# Altium PCB PCB.PcbDoc
Units mm, origin at the board's own origin, x right, y up, seen from the top; angles counter-clockwise.
Board outline 40.8 x 72.4 mm, 2 copper layers (Top Layer, Bottom Layer); 67 components, 54 nets, 238 pads, 98 vias.
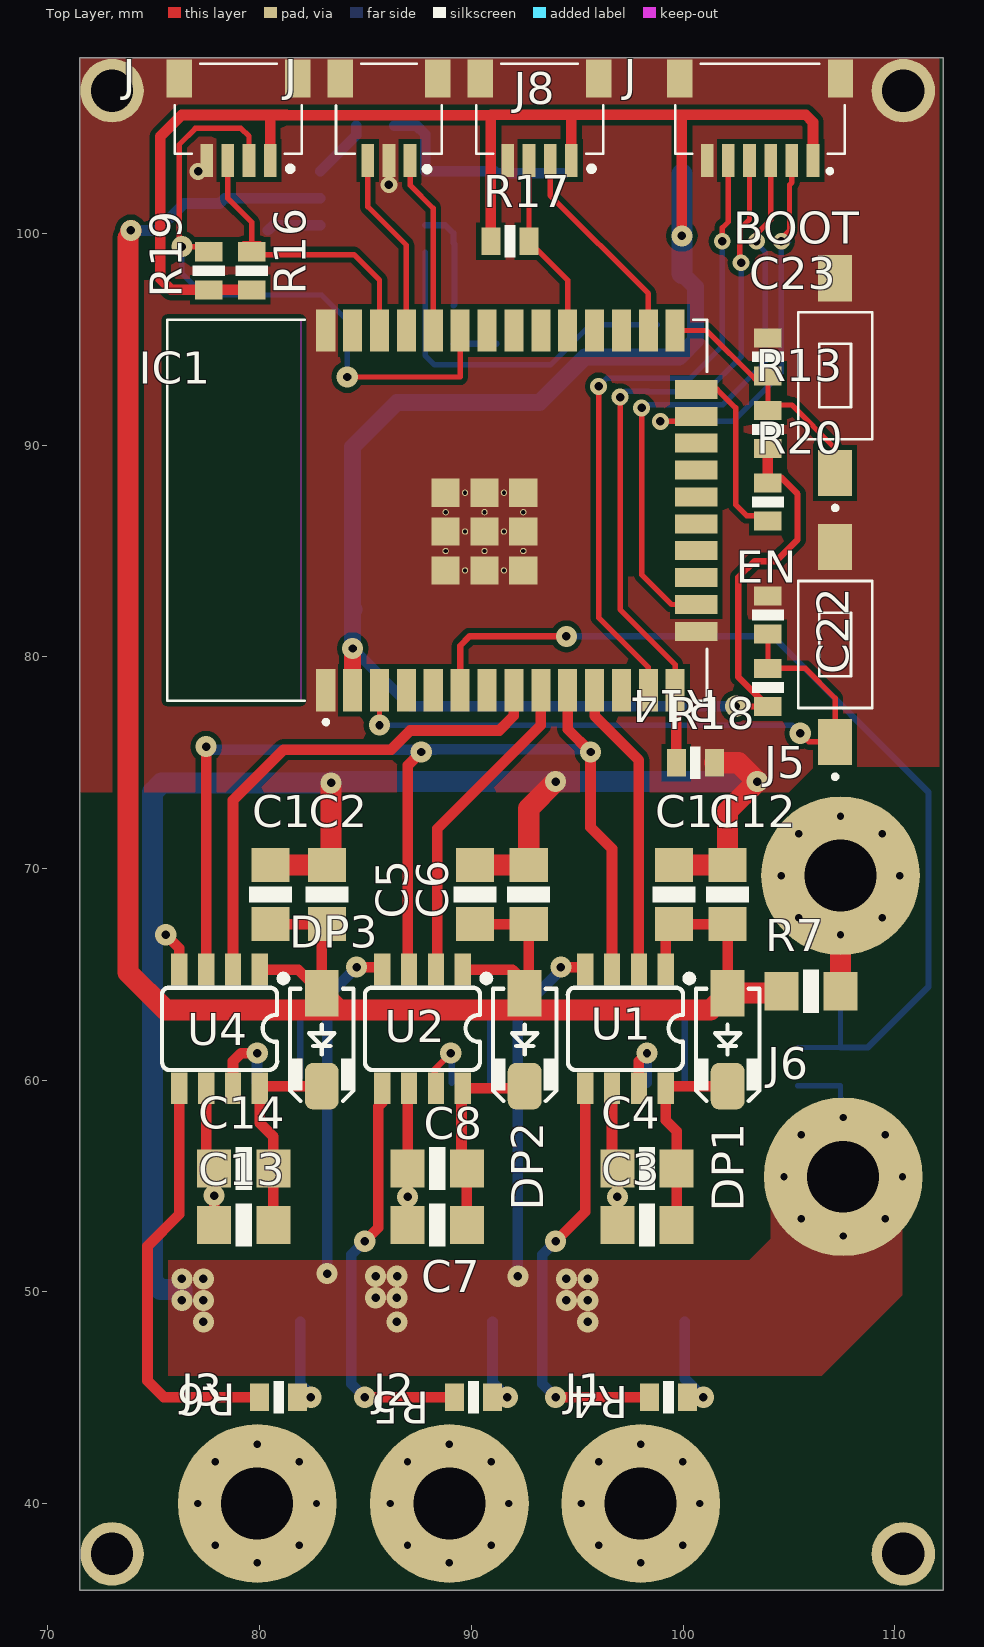
[diagram p0: Top Layer view]
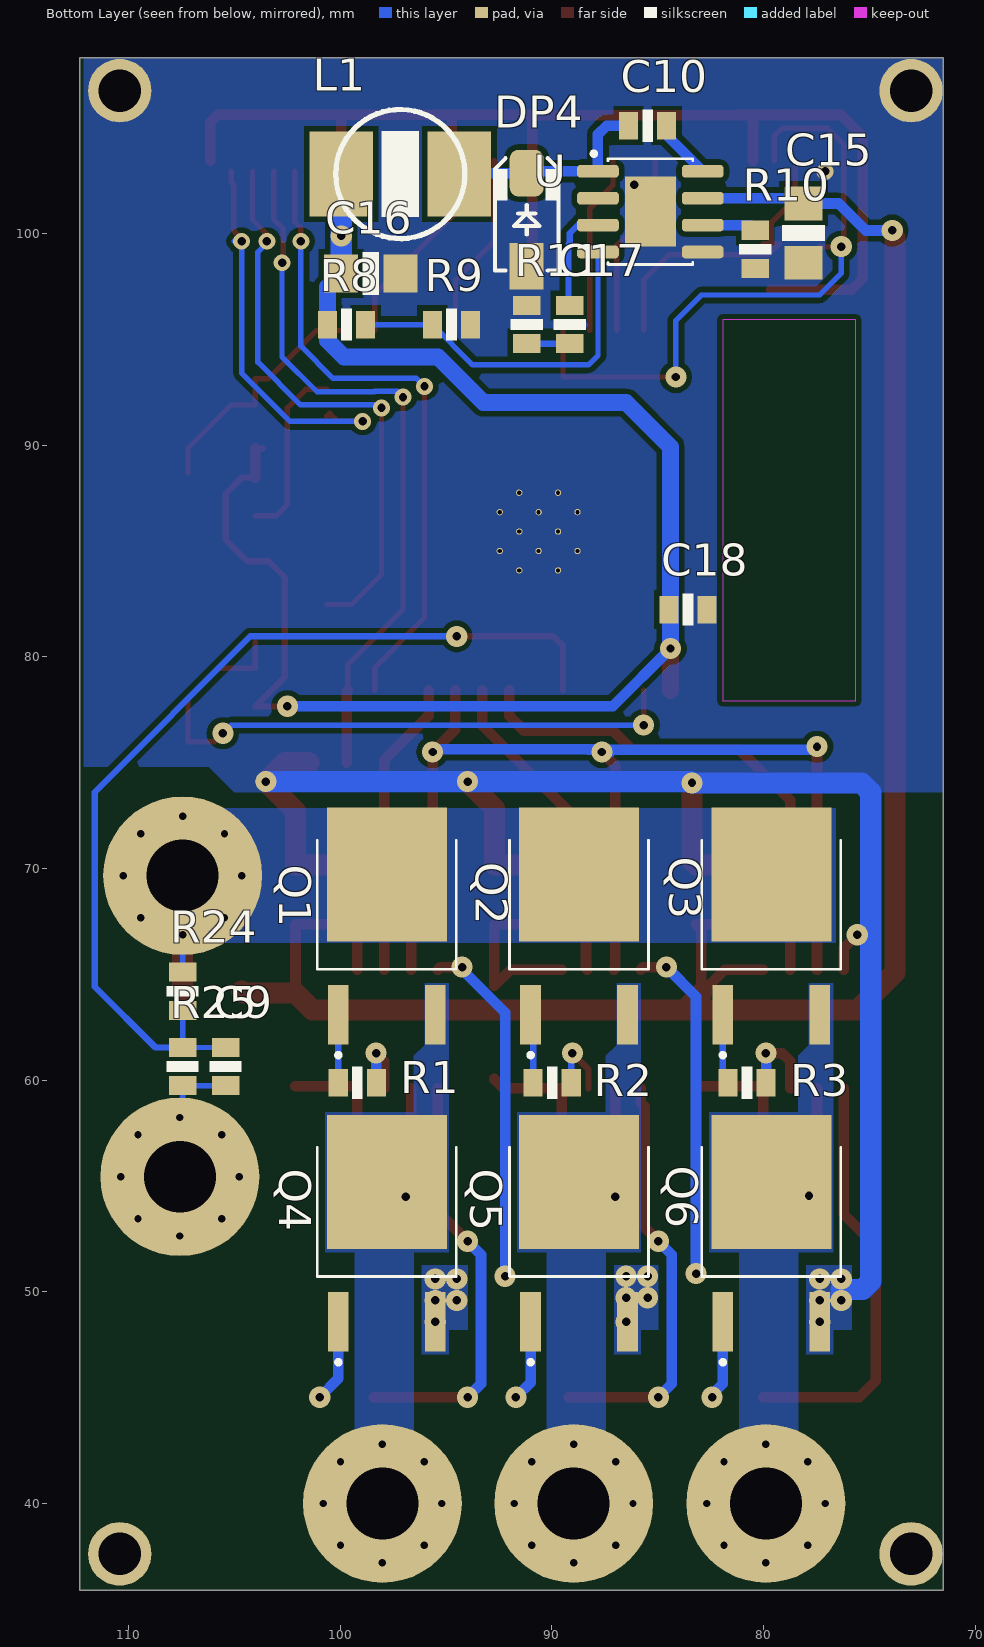
[diagram p1: Bottom Layer view, seen from below]

## Layer stack, top to bottom
Top Solder: solder mask 0.0102, Solder Resist, Dk 3.5
Top Layer: signal copper 0.0356
Dielectric 1: dielectric 0.32, FR-4, Dk 4.8
Bottom Layer: signal copper 0.0356
Bottom Solder: solder mask 0.0102, Solder Resist, Dk 3.5

## Board outline
71.5,35.9 71.5,108.3 112.3,108.3 112.3,35.9

## Design rules (kind name [scope] priority, off if disabled: settings)
Clearance [All] p1: gap=0.254 ignorepadtopadclearanceinfootprint=FALSE except(0: Arc-Hole Track-Hole SMDPad-Hole THPad-Hole Via-Hole Fill-Hole Poly-Hole Region-Hole Text-Hole)
PolygonConnect [All] p1: connectstyle=Direct reliefconductorwidth=0.254 reliefentries=4 polygonreliefangle="90 Angle" airgapwidth=0.254
RoutingVias [All] p1: holewidth=0.711 width=1.27 viastyle="Through Hole" minholewidth=0.711 minwidth=1.27 maxholewidth=0.711 maxwidth=1.27
SolderMaskExpansion [All] p1: expansion=0.102
Width [All] p1: maxlimit=4 minlimit=0.254 preferedwidth=0.3
30 further rules are at their usual default settings.

## Classes and differential pairs
component class mcu: BOOT BOOT? C9 C18 C22 C23 EN EN? IC1 IC? J J8 R13 R14 R16 R17 R18 R19 R20 R24 R25 R?
component class power: C1 C2 C3 C4 C5 C6 C7 C8 C10 C11 C12 C13 C14 C15 C16 C17 C? DP1 DP2 DP3 DP4 J1 J2 J3 J5 J6 L1 Q1 Q2 Q3 Q4 Q5 Q6 Q? R1 R2 R3 R4 R5 R6 R7 R8 R9 R10 R11 R? U U1 U2 U4 UP?

## Components (designator, comment, footprint, x,y, rotation, side; value= is the part's Value field where it differs from the comment)
BOOT "1437566-4" SW_1437566-4 107.188,93.281 r90 top
C1 "Cap" _1206 80.518,68.77 r90 top value=100nF
C2 "Cap" _1206 83.185,68.77 r90 top value=10uF
C3 "Cap" _1206 98.298,53.149 r180 top value=100nF
C4 "Cap" _1206 98.298,55.816 r180 top value=10uF
C5 "Cap" _1206 90.17,68.77 r90 top value=100nF
C6 "Cap" _1206 92.71,68.77 r90 top value=10uF
C7 "Cap" _1206 88.392,53.149 r180 top value=100nF
C8 "Cap" _1206 88.392,55.816 r180 top value=10uF
C9 "Cap" _0805 105.41,60.642 r270 bottom value=100nF
C10 "Cap" _0805 85.471,105.093 r0 bottom value=100nF
C11 "Cap" _1206 99.568,68.77 r90 top value=100nF
C12 "Cap" _1206 102.108,68.77 r90 top value=10uF
C13 "Cap" _1206 79.248,53.149 r180 top value=100nF
C14 "Cap" _1206 79.248,55.816 r180 top value=10uF
C15 "Cap" _1206 78.105,100.013 r270 bottom value=10uF
C16 "Cap" _1206 98.552,98.108 r180 bottom value=10uF
C17 "Cap" _0805 89.154,95.694 r270 bottom value=150pF
C18 "Cap" _0805 83.566,82.233 r180 bottom value=100nF
C22 "Cap" _0805 104.013,81.978 r90 top value=100nF
C23 "Cap" _0805 104.013,94.17 r90 top value=100nF
DP1 "1N5819" 430X270D 102.108,61.912 r270 top
DP2 "1N5819" 430X270D 92.519,61.912 r270 top
DP3 "1N5819" 430X270D 82.931,61.912 r270 top
DP4 "1N5819" 430X270D 91.186,100.647 r90 bottom
EN "1437566-4" SW_1437566-4 107.188,80.581 r90 top
IC1 "ESP32-WROOM-32" MODULE_ESP32-WROOM-32 88.381,86.916 r90 top
J "SPI" JST_SM06B-SRSS-TB(LF)(SN) 103.64,103.441 r180 top
J "ENC/I2C" JST_SM04B-SRSS-TB(LF)(SN) 78.994,103.441 r180 top
J "UART" JST_SM03B-SRSS-TB(LF)(SN) 86.106,103.441 r180 top
J1 "" "M3 Spade Hole" 98,40 r0 top
J2 "" "M3 Spade Hole" 88.963,40 r0 top
J3 "" "M3 Spade Hole" 79.883,40 r0 top
J5 "" "M3 Spade Hole" 107.442,69.659 r0 top
J6 "" "M3 Spade Hole" 107.569,55.435 r0 top
J8 "CAN/ANG" JST_SM04B-SRSS-TB(LF)(SN) 93.226,103.441 r180 top
L1 "Inductor" _INDUCTOR-SMD-6.0mm 97.155,102.806 r0 bottom value=10uH
Q1 "FILL_FOOTPRINT" TO229P994X240-3N 97.791,67.276 r90 bottom
Q2 "FILL_FOOTPRINT" TO229P994X240-3N 88.711,67.276 r90 bottom
Q3 "FILL_FOOTPRINT" TO229P994X240-3N 79.63,67.276 r90 bottom
Q4 "FILL_FOOTPRINT" TO229P994X240-3N 97.791,52.768 r90 bottom
Q5 "FILL_FOOTPRINT" TO229P994X240-3N 88.711,52.768 r90 bottom
Q6 "FILL_FOOTPRINT" TO229P994X240-3N 79.63,52.768 r90 bottom
R1 "Resistor" _0805 99.187,59.88 r180 bottom value=10R
R2 "Resistor" _0805 89.98,59.88 r180 bottom value=10R
R3 "Resistor" _0805 80.773,59.88 r180 bottom value=10R
R4 "Resistor" _0805 99.312,45.021 r180 top value=10R
R5 "Resistor" _0805 90.105,45.021 r180 top value=10R
R6 "Resistor" _0805 80.898,45.021 r180 top value=10R
R7 "Resistor" _1206 106.045,64.198 r180 top value=0
R8 "Resistor" _0805 99.695,95.694 r0 bottom value=100K
R9 "Resistor" _0805 94.742,95.694 r0 bottom value=100K
R10 "Resistor" _0805 80.391,99.251 r90 bottom value=100K
R11 "Resistor" _0805 91.186,95.694 r270 bottom value=100K
R13 "Resistor" _0805 104.013,90.742 r270 top value=4.7K
R14 "Resistor" _0805 104.013,78.549 r270 top value=4.7K
R16 "Resistor" _0805 79.629,98.234 r270 top value=4.7K
R17 "Resistor" _0805 91.821,99.632 r180 top value=4.7K
R18 "Resistor" _0805 100.584,74.993 r180 top value=4.7K
R19 "Resistor" _0805 77.597,98.234 r270 top value=4.7K
R20 "Resistor" _0805 104.013,87.312 r90 top value=4.7K
R24 "Resistor" _0805 107.442,64.198 r90 bottom value=4.7K
R25 "Resistor" _0805 107.442,60.642 r90 bottom value=4.7K
U "MP1584EN" SOIC127P600X170-9N 85.344,101.028 r180 bottom
U1 "IR2104" _SO08 97.282,62.42 r180 top
U2 "IR2104" _SO08 87.694,62.42 r180 top
U4 "IR2104" _SO08 78.105,62.42 r180 top

## Footprints (in the part's own frame and the unit in brackets; to place one, negate y for a bottom-side part, rotate by r counter-clockwise, add the part's x,y. Pads: shape width x height; smd on the part's side, far side on the other; paste and mask are expansions set on the pad)
430X270D [mm] "SMA Molded Diode, 2-Leads, Body 4.3x2.7mm"
  rect 2.2x1.6 smd: 1(-2.2,0)
  rrect50% 2.2x1.6 smd: 2(2.2,0)
  silkscreen extent -2.4,-1.5 2.9,1.5, body extent -2.75,-1.4 2.75,1.4, height 2.6
_0805 [mm]
  rect 0.9x1.3 smd: 1(-0.9,0) 2(0.9,0)
  silkscreen extent -0.25,-0.76 0.25,0.76
_1206 [mm]
  rect 1.6x1.8 smd: 1(-1.4,0) 2(1.4,0)
  silkscreen extent -0.38,-1.02 0.38,1.02
_INDUCTOR-SMD-6.0mm [mm]
  rect 3x4 smd: 1(-2.794,0) 2(2.794,0)
  silkscreen extent -3.05,-3.05 3.05,3.05
_SO08 [mm]
  rect 0.77x1.5 smd: 1(-1.905,-2.8) 2(-0.635,-2.8) 3(0.635,-2.8) 4(1.905,-2.8) 5(1.905,2.8) 6(0.635,2.8) 7(-0.635,2.8) 8(-1.905,2.8)
  silkscreen extent -3.33,-2.7 2.72,1.95
JST_SM03B-SRSS-TB(LF)(SN) [mm]
  rect 0.6x1.55 smd: 1(-1,0) 2(0,0) 3(1,0)
  rect 1.2x1.8 smd: S1(-2.3,-3.875) S2(2.3,-3.875)
  silkscreen extent -2.5,-4.57 2.5,0.5
JST_SM04B-SRSS-TB(LF)(SN) [mm]
  rect 0.6x1.55 smd: 1(-1.5,0) 2(-0.5,0) 3(0.5,0) 4(1.5,0)
  rect 1.2x1.8 smd: S1(-2.8,-3.875) S2(2.8,-3.875)
  silkscreen extent -3,-4.57 3,0.48
JST_SM06B-SRSS-TB(LF)(SN) [mm]
  rect 0.6x1.55 smd: 1(-2.5,0) 2(-1.5,0) 3(-0.5,0) 4(0.5,0) 5(1.5,0) 6(2.5,0)
  rect 1.2x1.8 smd: S1(-3.8,-3.875) S2(3.8,-3.875)
  silkscreen extent -4,-4.57 4,0.6
"M3 Spade Hole" [mm]
  round 7.5 hole 3.4: 1(0,0)
MODULE_ESP32-WROOM-32 [mm]
  rect 2x0.9 smd: 1(-8.5,5.26) 2(-8.5,3.99) 3(-8.5,2.72) 4(-8.5,1.45) 5(-8.5,0.18) 6(-8.5,-1.09) 7(-8.5,-2.36) 8(-8.5,-3.63) 9(-8.5,-4.9) 10(-8.5,-6.17) 11(-8.5,-7.44) 12(-8.5,-8.71) 13(-8.5,-9.98) 14(-8.5,-11.25) 25(8.5,-11.25) 26(8.5,-9.98) 27(8.5,-8.71) 28(8.5,-7.44) 29(8.5,-6.17) 30(8.5,-4.9) 31(8.5,-3.63) 32(8.5,-2.36) 33(8.5,-1.09) 34(8.5,0.18) 35(8.5,1.45) 36(8.5,2.72) 37(8.5,3.99) 38(8.5,5.26)
  rect 0.9x2 smd: 15(-5.715,-12.25) 16(-4.445,-12.25) 17(-3.175,-12.25) 18(-1.905,-12.25) 19(-0.635,-12.25) 20(0.635,-12.25) 21(1.905,-12.25) 22(3.175,-12.25) 23(4.445,-12.25) 24(5.715,-12.25)
  rect 1.33x1.33 smd: 39_1(-2.835,-0.405) 39_2(-1,-0.405) 39_3(0.835,-0.405) 39_4(-2.835,-2.24) 39_5(-1,-2.24) 39_6(0.835,-2.24) 39_7(-2.835,-4.075) 39_8(-1,-4.075) 39_9(0.835,-4.075)
  round 0.3 hole 0.2: 39_10(-1.917,-0.405) 39_11(-0.082,-0.405) 39_12(-2.835,-1.322) 39_13(-1,-1.322) 39_14(0.835,-1.322) 39_15(-1.917,-2.24) 39_16(-0.082,-2.24) 39_17(-2.835,-3.157) 39_18(-1,-3.157) 39_19(0.835,-3.157) 39_20(-1.917,-4.075) 39_21(-0.082,-4.075)
  Keep-Out Layer region: 9,6.45 -9,6.45 -9,12.75 9,12.75
  Keep-Out Layer region: 9,6.45 -9,6.45 -9,12.75 9,12.75
  silkscreen extent -10.1,-12.75 9,12.75, body extent -9,-12.75 9,12.75, height 3.2
SOIC127P600X170-9N [mm]
  rrect54% 1.97x0.6 smd: 1(-2.475,1.905) 2(-2.475,0.635) 3(-2.475,-0.635) 4(-2.475,-1.905) 5(2.475,-1.905) 6(2.475,-0.635) 7(2.475,0.635) 8(2.475,1.905)
  rect 2.41x3.3 smd paste-3: 9(0,0)
  silkscreen extent -2.77,-2.5 2,2.84
SW_1437566-4 [mm]
  rect 2.18x1.6 smd: 1(-4.6,0) 2(4.6,0)
  silkscreen extent -6.35,-1.75 3,1.75
TO229P994X240-3N [mm]
  rect 6.33x5.67 smd paste-4: D(2.43,0)
  rect 2.81x0.98 smd: G(-4.19,2.29) S(-4.19,-2.29)
  silkscreen extent -6.19,-3.28 4.06,3.28

## Part data
BOOT EN: "Switch Tactile OFF _ON_ SPST Rectangular Button Gull Wing 0.05A 12VDC 1.77N SMD T/R", Contact_Current_Rating="50 mA", Package=None, Configuration_Pole-Throw="Single Pole - Single Throw", Digi-Key_Part_Number=450-1758-1-ND, Digi-Key_Purchase_URL=https://www.digikey.com/product-detail/en/te-connectivity-alcoswitch-switches/FSMSMTR/450-1758-1-ND/2271637?utm_source=snapeda&utm_medium=aggregator&utm_campaign=symbol, MF="TE Connectivity", MP=FSMSMTR, SnapEDA_Link=https://www.snapeda.com/parts/FSMSMTR/TE%20Connectivity%20ALCOSWITCH%20Switches/view-part/2118497/?ref=snap, TE_purchase_URL=https://www.te.com/usa-en/product-1437566-4.html?te_bu=Cor&te_type=disp&te_campaign=seda_glo_cor-seda-global-disp-prtnr-fy19-seda-model-bom-cta_sma-317_1&elqCampaignId=32493
C1 C2 C3 C4 C5 C6 C7 C8 C9 C10 C11 C12 C13 C14 C15 C16 C17 C18 C22 C23: library part Cap_1
DP1 DP2 DP3 DP4: "Schottkey Rectifiers", Data=16-12-2016, Designer="Abbas Basereh"
IC1: "Bluetooth, WiFi 802.11b/g/n, Bluetooth v4.2 +EDR, Class 1, 2 and 3 Transceiver Module 2.4GHz ~ 2.5GHz Antenna Not Included, U.FL Surface Mount", Package="Module Espressif Systems", Check_prices=https://www.snapeda.com/parts/ESP32-WROOM-32/Espressif+Systems/view-part/?ref=eda, Digi-Key_Part_Number=1965-ESP32-WROOM-32U-N4CT-ND, MF="Espressif Systems", MP=ESP32-WROOM-32, Purchase-URL=https://pricing.snapeda.com/search/part/ESP32-WROOM-32/?ref=eda, SnapEDA_Link=https://www.snapeda.com/parts/ESP32-WROOM-32/Espressif+Systems/view-part/?ref=snap
J: library part SM06B-SRSS-TB(LF)(SN), "Connector Header Surface Mount, Right Angle 6 position 0.039 _1.00mm_", Package=None, Digi-Key_Part_Number=455-1806-1-ND, Digi-Key_Purchase_URL=https://www.digikey.com/product-detail/en/jst-sales-america-inc/SM06B-SRSS-TB_LF__SN_/455-1806-1-ND/926877?utm_source=snapeda&utm_medium=aggregator&utm_campaign=symbol, MF="JST Sales", MP=SM06B-SRSS-TB_LF__SN_, SnapEDA_Link=https://www.snapeda.com/parts/SM06B-SRSS-TB%28LF%29%28SN%29/JST%20Sales%20America%20Inc./view-part/554386/?ref=snap
J J8: library part SM04B-SRSS-TB(LF)(SN), "Connector Header Surface Mount, Right Angle 4 position 0.039 _1.00mm_", Package=None, Availability=Unavailable, MF="JST Sales", MP=SM04B-SRSS-TB_LF__SN_, Price=None, SnapEDA_Link=https://www.snapeda.com/parts/SM04B-SRSS-TB%28LF%29%28SN%29/JST%20Sales%20America%20Inc./view-part/557466/?ref=snap
J: library part SM03B-SRSS-TB(LF)(SN), "Connector Header Surface Mount, Right Angle 3 position 0.039 _1.00mm_", Package=None, Availability=Unavailable, MF="JST Sales", MP=SM03B-SRSS-TB_LF__SN_, Price=None, SnapEDA_Link=https://www.snapeda.com/parts/SM03B-SRSS-TB%28LF%29%28SN%29/JST%20Sales%20America%20Inc./view-part/3227115/?ref=snap
J1 J2 J3 J5 J6: library part "M3 Spade Terminal", "M3 Spade Terminal"
Q1 Q2 Q3 Q4 Q5 Q6: library part NTMFS4935NT1G, "MOSFET N-CH 30V 13A SO8FL", Current - Continuous Drain (Id) @ 25°C="13A (Ta), 93A (Tc)", Drain to Source Voltage (Vdss)=30V, Drive Voltage (Max Rds On,  Min Rds On)="4.5V, 10V", Input Capacitance (Ciss) (Max) @ Vds="4850pF @ 15V", Manufacturer="ON Semiconductor", Operating Temperature="-55°C ~ 150°C (TJ)", Package / Case="8-PowerTDFN, 5 Leads", Power Dissipation (Max)="930mW (Ta), 48W (Tc)", Supplier Device Package="5-DFN (5x6) (8-SOFL)", Supplier Part Number 1=NTMFS4935NT1GOSCT-ND, Category="Discrete Semiconductor Products", ComponentLink1Description=http://www.onsemi.com/pub_link/Collateral/NTMFS4935N-D.PDF, ComponentLink1URL=http://www.onsemi.com/pub_link/Collateral/NTMFS4935N-D.PDF, FET Feature=-, FET Type=N-Channel, Gate Charge (Qg) (Max) @ Vgs="49.4nC @ 10V", Manufacturer Part Number=NTMFS4935NT1G, Mounting Type="Surface Mount", Packaging="Cut Tape (CT)", Part Status=Active, Pricing 1="1=0.61, 10=0.541, 100=0.4145, 500=0.3277 (USD)", Rds On (Max) @ Id, Vgs="3.2 mOhm @ 30A, 10V", RoHS="RoHS Compliant", Stock 1=932, Supplier 1=Digi-Key, Technology="MOSFET (Metal Oxide)", Vgs (Max)=±20V, Vgs(th) (Max) @ Id="2.2V @ 250µA"
U: "Buck Switching Regulator IC Positive Adjustable 0.8V 1 Output 3A 8-SOIC _0.154, 3.90mm Width_ Exposed Pad", Package="SOIC-8 Monolithic Power", Availability=Unavailable, MF="Monolithic Power", MP=MP1584EN, Price=None, SnapEDA_Link=https://www.snapeda.com/parts/MP1584EN/Monolithic%20Power%20Systems%20Inc./view-part/891721/?ref=snap

## Free pads (board coordinates)
  round 3 hole 2: ""(73.025,37.618) ""(73.025,106.743) ""(110.409,37.618) ""(110.409,106.743)

## Via types
v1: diameter 1, hole 0.4, Top Layer to Bottom Layer, 48 vias
v2: diameter 0.7, hole 0.35, Top Layer to Bottom Layer, 40 vias
v3: diameter 0.8, hole 0.4, Top Layer to Bottom Layer, 10 vias

## Nets (pads, with @x,y where several pads share a name; then routed paths per layer and width w, separated by ;. In a path a pad name is that pad's centre, name@x,y a point inside that pad or via, vN(x,y) a via of type N, cw(c..) or ccw(c..) an arc to the next point about the centre after c; other vN are vias at no path point)
3V3: C16.1 C18.1 IC1.2 J8.1 J.1@80.494,103.441 J.1@106.14,103.441 L1.2 R8.2 R13.2 R14.2 R16.2 R17.2 R19.2 R20.2 | length 134.9
  Top Layer w0.3: v1(102.489,77.66) 102.5,77.65 R14.2 102.616,79.047 102.616,83.757 103.378,84.519 104.394,84.519 105.41,85.534 105.41,87.694 104.637,88.466 R20.2@104.013,88.466 ; R13.2@103.643,89.842 R13.2
  Top Layer w0.5: R16.2 R19.2 75.83,97.335 75.307,97.858 75.307,104.58 76.323,105.596 81.252,105.596 81.259,105.59 90.921,105.59 ; J.1@80.494,103.441 80.494,105.474 ; R17.2 90.921,105.59 ; J8.1 94.726,105.585 ; v1(99.949,99.885) 99.949,105.6 ; R20.2@104.013,88.466 R13.2 ; J.1@106.14,103.441 106.14,105.251 105.791,105.6 99.949,105.6 ; 90.921,105.59 90.932,105.6 99.949,105.6
  Top Layer w0.8: IC1.2 v1(84.391,80.392)
  Bottom Layer w0.5: v1(84.391,80.392) 87.122,77.66 v1(102.489,77.66)
  Bottom Layer w0.8: v1(84.391,80.392) C18.1@84.391,82.158 ; C18.1 C18.1@84.391,82.158 ; C16.1 100.595,97.465 R8.2 100.595,94.943 99.822,94.17 95.377,94.17 93.218,92.011 86.487,92.011 84.391,89.915 C18.1@84.391,82.158
  Bottom Layer w1: L1.2 v1(99.949,99.885) 99.949,98.111 C16.1
+12V: C1.1 C2.1 C5.1 C6.1 C11.1 C12.1 C15.1 DP1.1 DP2.1 DP3.1 R7.2 U1.1 U2.1 U4.1 U.7 | length 103.9
  Top Layer w0.5: U4.1 81.823,65.221 DP3.1 82.931,67.116 C2.1 C1.1 ; U2.1@89.535,65.221 U2.1 91.942,65.221 92.71,64.453 C6.1 C5.1 ; U1.1 99.187,66.989 C11.1 C12.1 DP1.1
  Top Layer w1: v1@73.787,99.787 73.787,65.087 75.565,63.309 83.734,63.309 ; v1@73.9,100.1 73.914,100.114 v1(73.914,100.139) ; DP3.1 83.734,63.309 ; R7.2 104.559,64.113 DP1.1 101.305,63.309 83.734,63.309
  Bottom Layer w0.5: v1(73.914,100.139) 75.161,100.139 76.434,101.413 C15.1 78.356,101.663 U.7
A_N: IC1.5
A_P: IC1.4
"CAN RX": IC1.26 J8.2 | length 9.9
  Top Layer w0.254: J8.2 93.726,101.79 98.361,97.156 IC1.26
"CAN TX": IC1.29 J8.3 R17.1 | length 8.8
  Top Layer w0.254: J8.3 92.726,99.615 94.551,97.791 IC1.29
CS: IC1.23 J.2@105.14,103.441 | length 19.2
  Top Layer w0.254: v3(98.933,91.123) 100.107,91.123 100.488,91.504 IC1.23 ; J.2@105.14,102.933 105.14,102.41 105.029,102.298 105.029,100.139 v3@104.821,99.931 ; v3@104.821,99.931 104.821,99.804 v3(104.648,99.632) 104.648,99.758 v3@104.821,99.931
  Bottom Layer w0.254: v3(98.933,91.123) 102.362,91.123 104.648,93.408 104.648,99.282 104.997,99.632 v3(104.648,99.632)
DCBUS: J5.1 Q1.D Q2.D Q3.D R7.1 R24.2 | length 4.4
  Top Layer w1: v2(107.442,66.859) 107.445,66.856 R7.1
  Bottom Layer w0.254: R24.2 v2(107.442,66.859)
  other v2: 105.462,67.68 109.422,67.68 104.642,69.659 110.242,69.659 105.462,71.639 109.422,71.639 107.442,72.46
DIR: IC1.31
EN: C22.1 EN.1 IC1.3 R14.1 | length 30.6
  Top Layer w0.254: v1(85.661,76.772) IC1.3 ; C22.1@104.013,80.698 R14.1 105.78,79.449 107.188,78.041 EN.1 105.946,75.982 v1(105.537,76.391)
  Bottom Layer w0.254: v1(85.661,76.772) 105.156,76.772 v1(105.537,76.391)
ENABLE: IC1.27
ESTOP: IC1.28
G_EN: IC1.10 U1.3 U2.3 U4.3 | length 54.9
  Top Layer w0.5: U4.3 v1(77.47,75.755) ; U2.3 86.995,65.284 86.995,74.867 v1(87.63,75.501) ; IC1.10 94.551,76.582 v1(95.631,75.501) 95.631,71.945 96.647,70.929 U1.3
  Bottom Layer w0.5: v1(77.47,75.755) 77.609,75.617 v1@87.364,75.617 ; v1(87.63,75.501) 87.249,75.501 v1@87.364,75.617 ; 88.265,75.617 v1@87.364,75.617 ; v1(95.631,75.501) 95.504,75.629 87.376,75.629 v1@87.364,75.617
GH_A: R1.2 U1.7 | length 3.2
  Top Layer w0.5: U1.7 97.917,60.896 v1(98.298,61.277)
  Bottom Layer w0.5: R1.2 98.287,61.267 v1(98.298,61.277)
GH_B: R2.2 U2.7 | length 3.4
  Top Layer w0.3: U2.7@88.265,59.62 88.265,60.515 v1(89.027,61.277)
  Bottom Layer w0.3: v1(89.027,61.277) 89.08,61.224 R2.2
GH_C: R3.2 U4.7 | length 4
  Top Layer w0.5: U4.7 78.74,60.896 79.121,61.277 v1(79.883,61.277)
  Bottom Layer w0.5: R3.2 79.874,61.268 v1(79.883,61.277)
GL_A: R4.2 U1.5 | length 20.1
  Top Layer w0.5: v1(93.98,45.021) R4.2 ; v1(93.98,52.387) 95.377,53.785 U1.5
  Bottom Layer w0.5: v1(93.98,45.021) 93.345,45.657 93.345,51.752 v1(93.98,52.387)
GL_B: R5.2 U2.5 | length 19.7
  Top Layer w0.5: v1(84.963,45.021) R5.2 ; v1(84.963,52.387) 85.598,53.023 85.598,58.737 85.788,58.928 U2.5
  Bottom Layer w0.5: v1(84.963,45.021) 84.328,45.657 84.328,51.752 v1(84.963,52.387)
GL_C: R6.2 U4.5 | length 20.1
  Top Layer w0.5: U4.5 76.2,53.657 74.7,52.158 74.7,45.8 75.479,45.021 R6.2
GND: BOOT.2 C1.2 C2.2 C5.2 C6.2 C9.2 C11.2 C12.2 C15.2 C16.2 C18.2 C22.2 C23.2 DP4.1 EN.2 IC1.1 IC1.15 IC1.38 IC1.39_1 IC1.39_2 IC1.39_3 IC1.39_4 IC1.39_5 IC1.39_6 IC1.39_7 IC1.39_8 IC1.39_9 IC1.39_10 IC1.39_11 IC1.39_12 IC1.39_13 IC1.39_14 IC1.39_15 IC1.39_16 IC1.39_17 IC1.39_18 IC1.39_19 IC1.39_20 IC1.39_21 J6.1 J8.4 J8.S1 J8.S2 J.2@86.106,103.441 J.4@77.494,103.441 J.6 J.S1 J.S2 pad.@73.025,106.743 pad.@110.409,106.743 Q4.S Q5.S Q6.S R9.1 R10.1 R11.1 R18.1 R25.1 U1.4 U2.4 U4.4 U.5 U.9 | length 115.5
  Top Layer w0.5: v1(75.565,66.865) 76.2,66.23 U4.4 ; v1(84.582,65.341) 85.668,65.341 U2.4 ; v1(94.234,65.341) 95.256,65.341 U1.4
  Top Layer w1: C1.2 C2.2 83.376,70.361 v1(83.376,74.041) ; C5.2 C6.2 92.71,72.834 v1(93.98,74.105) ; C11.2 C12.2 102.108,72.707 v1(103.505,74.105) 102.616,74.993 R18.1
  Bottom Layer w0.254: C9.2 R25.1 107.442,58.363 v2(107.569,58.236)
  Bottom Layer w0.5: v1(83.185,50.863) 83.185,63.944 v1(84.582,65.341) ; v1(92.202,50.736) 92.202,63.182 94.234,65.215 v1(94.234,65.341)
  Bottom Layer w1: v1(76.327,49.593) 76.327,50.102 75.311,50.102 74.93,50.482 74.93,73.596 75.374,74.041 v1(83.376,74.041) 83.439,74.105 v1(93.98,74.105) v1(103.505,74.105)
  other v1: 77.34,48.579 86.484,48.579 95.501,48.579 94.488,49.593 77.34,49.595 95.501,49.595 85.474,49.719 86.487,49.721 76.327,50.609 77.343,50.609 94.488,50.609 95.504,50.609 85.474,50.735 86.49,50.735
  other v2: 107.569,52.635 105.589,53.456 109.549,53.456 104.769,55.435 110.369,55.435 105.589,57.415 109.549,57.415
  other v3: 86.106,102.298 77.089,102.933
HA: IC1.11 U1.2 | length 14.1
  Top Layer w0.5: IC1.11 95.821,77.217 97.917,75.12 U1.2
HB: IC1.9 U2.2 | length 15.2
  Top Layer w0.5: U2.2 88.384,65.276 88.384,71.874 93.281,76.771 IC1.9
HC: IC1.8 U4.2 | length 24.1
  Top Layer w0.5: U4.2 78.74,73.215 81.141,75.617 86.221,75.617 87.122,76.517 91.313,76.517 92.011,77.215 IC1.8
IO0: BOOT.1 C23.1 IC1.25 R13.1 | length 11.8
  Top Layer w0.254: IC1.25 101.117,95.416 103.389,93.144 104.013,93.144 104.013,91.895 105.145,91.895 107.188,89.852 BOOT.1
IO2: IC1.24 R20.1 | length 8.5
  Top Layer w0.254: IC1.24 101.616,92.631 102.489,91.757 102.489,87.185 103.008,86.667 R20.1@104.013,86.667
MISO: IC1.14 J.4@103.14,103.441 R18.2 | length 33.9
  Top Layer w0.254: v3(97.028,92.266) 97.028,82.233 99.631,79.63 IC1.14 ; v3(102.743,98.615) 102.682,98.677 102.682,100.201 103.14,100.659 J.4@103.14,102.933
  Top Layer w0.5: IC1.14 99.684,78.362 R18.2
  Bottom Layer w0.254: v3(97.028,92.266) 97.301,92.539 98.367,92.539 98.387,92.519 101.092,92.519 102.743,94.17 v3(102.743,98.615)
MOSI: IC1.16 J.3@104.14,103.441 | length 27.6
  Top Layer w0.254: v3@98.044,92.011 v3(98.044,91.757) 98.044,83.883 99.457,82.471 IC1.16 ; v3@103.378,99.632 103.378,99.885 104.14,100.647 J.3@104.14,102.933
  Bottom Layer w0.254: v3(98.044,91.757) 98.19,91.904 101.873,91.904 103.886,93.916 103.886,99.123 v3@103.378,99.632
  other v3: 103.463,99.632
NetC3_1: C3.1 C4.1 DP1.2 U1.8 | length 9.6
  Top Layer w0.5: C3.1 C4.1 99.698,57.591 99.187,58.102 U1.8 99.279,59.712 DP1.2
NetC7_1: C7.1 C8.1 DP2.2 U2.8 | length 9.9
  Top Layer w0.5: C7.1 89.792,55.689 89.535,55.947 89.535,59.62 U2.8 92.278,59.62 DP2.2@92.71,60.052
NetC10_1: C10.1 U.8 | length 2.9
  Bottom Layer w0.5: U.8 84.571,104.636 C10.1
NetC10_2: C10.2 DP4.2 L1.1 U.1 | length 10
  Bottom Layer w0.5: C10.2 87.407,105.093 87.819,104.681 U.1 91.1,102.933 DP4.2 94.32,102.848 L1.1
NetC13_1: C13.1 C14.1 DP3.2 U4.8 | length 9.7
  Top Layer w0.5: C13.1 C14.1 80.648,57.337 80.01,57.975 U4.8 80.102,59.712 DP3.2
NetC17_1: C17.1 U.3 | length 5
  Bottom Layer w0.3: U.3 88.773,100.393 89.154,100.013 89.154,99.55 89.208,99.496 89.208,96.648 C17.1
NetC17_2: C17.2 R11.2 | length 2
  Bottom Layer w0.3: C17.2 R11.2
NetQ1_G: Q1.G R1.1 | length 3.2
  Bottom Layer w0.3: Q1.G 100.087,63.08 R1.1
NetQ2_G: Q2.G R2.1 | length 3.3
  Bottom Layer w0.3: R2.1 90.88,62.965 Q2.G
NetQ3_G: Q3.G R3.1 | length 3.3
  Bottom Layer w0.3: R3.1 81.92,60.128 Q3.G
NetQ4_G: Q4.G R4.1 | length 3.9
  Bottom Layer w0.5: Q4.G 100.081,45.905 v1(100.965,45.021)
NetQ5_G: Q5.G R5.1 | length 3.8
  Bottom Layer w0.5: Q5.G 91.001,45.715 v1(91.694,45.021)
NetQ6_G: Q6.G R6.1 | length 3.8
  Bottom Layer w0.5: Q6.G 81.92,45.651 82.423,45.148 v1(82.423,45.021)
NetR8_1: R8.1 R9.2 U.4 | length 16.8
  Bottom Layer w0.254: U.4 87.819,94.236 88.265,93.789 93.737,93.789 R9.2 R8.1
NetR10_2: R10.2 U.6 | length 2.6
  Bottom Layer w0.5: R10.2 80.634,100.393 U.6
PHA: C3.2 C4.2 J1.1 Q1.S Q4.D U1.6 | length 6.6
  Top Layer w0.5: U1.6 96.647,56.067 C4.2 v1(96.898,54.483) C3.2
  other v2: 98,37.2 96.02,38.02 99.98,38.02 95.2,40 100.8,40 96.02,41.98 99.98,41.98 98,42.8
PHB: C7.2 C8.2 J2.1 Q2.S Q5.D U2.6 | length 6.5
  Top Layer w0.5: C7.2 v1(86.992,54.483) C8.2 86.992,59.617 U2.6@86.995,59.62
  other v2: 88.963,37.2 86.984,38.02 90.943,38.02 86.163,40 91.763,40 86.984,41.98 90.943,41.98 88.963,42.8
PHC: C13.2 C14.2 J3.1 Q3.S Q6.D U4.6 | length 6.6
  Top Layer w0.5: U4.6 77.47,56.194 C14.2 v1(77.848,54.546) C13.2
  other v2: 79.883,37.2 77.903,38.02 81.863,38.02 77.083,40 82.683,40 77.903,41.98 81.863,41.98 79.883,42.8
PWM3: IC1.12
PWM6: IC1.37
RXD0: IC1.34 J.1@87.106,103.441 | length 8.5
  Top Layer w0.254: J.1@87.106,103.441 87.106,102.283 88.201,101.188 IC1.34
SCK: IC1.13 J.5 | length 30.3
  Top Layer w0.254: v3(96.012,92.773) 96.012,81.852 98.361,79.503 IC1.13 ; v3(101.854,99.632) 101.854,100.266 102.14,100.553 J.5@102.14,102.933
  Bottom Layer w0.254: v3(96.012,92.773) 96.393,93.154 100.33,93.154 101.854,94.678 v3(101.854,99.632)
SCL: IC1.33 J.2@79.494,103.441 R19.1 | length 31.3
  Top Layer w0.254: v1(76.327,99.377) 77.354,99.377 R19.1 ; v1@76.454,99.504 76.2,99.758 76.2,104.203 76.962,104.965 79.121,104.965 79.494,104.593 J.2@79.494,103.441 ; v1(84.138,93.217) 89.471,93.217 IC1.33
  Bottom Layer w0.254: v1(76.327,99.377) 76.327,98.108 77.343,97.091 82.931,97.091 84.138,95.884 v1(84.138,93.217)
SDA: IC1.36 J.3@78.494,103.441 R16.1 | length 15.6
  Top Layer w0.254: J.3@78.494,103.441 78.494,101.655 79.629,100.52 R16.1@79.629,99.515 ; IC1.36 85.661,97.791 84.455,98.996 79.767,98.996 R16.1 ; R16.1 80.01,99.515 R16.1@79.629,99.515 ; R16.1 79.248,99.515 R16.1@79.629,99.515 ; R16.1 R16.1@79.629,99.515
STEP: IC1.30
TXD0: IC1.35 J.3@85.106,103.441 | length 8.8
  Top Layer w0.254: J.3@85.106,103.441 85.106,101.267 86.931,99.442 IC1.35
VBUS_SENSE: C9.1 IC1.6 R24.1 R25.2 | length 45.8
  Top Layer w0.3: IC1.6 89.471,80.517 89.916,80.962 v1(94.488,80.962)
  Bottom Layer w0.254: C9.1 R25.2 R24.1
  Bottom Layer w0.3: v1(94.488,80.962) 104.238,80.962 111.596,73.604 111.596,64.415 108.723,61.542 R25.2
pads on no net: IC1.7 IC1.17 IC1.18 IC1.19 IC1.20 IC1.21 IC1.22 IC1.32 U.2

## Polygon pours and split planes (outlines as drawn)
DCBUS on Bottom Layer "Bottom Layer-No Net" (solid, remove dead copper, pour order 0): 106.553,72.834 106.553,66.484 76.581,66.484 76.581,72.834
PHC on Bottom Layer "Bottom Layer-No Net" (solid, pour order 4): 76.708,64.579 76.708,51.88 82.55,51.88 82.55,58.483 78.359,58.483 78.359,61.151 77.851,61.658 77.851,64.579
PHB on Bottom Layer "Bottom Layer-No Net" (solid, pour order 6): 85.788,64.579 85.788,51.88 91.63,51.88 91.63,58.483 87.439,58.483 87.439,61.151 86.931,61.658 86.931,64.579
PHA on Bottom Layer "Bottom Layer-No Net" (solid, pour order 8): 94.869,64.579 94.869,51.88 100.711,51.88 100.711,58.483 96.52,58.483 96.52,61.151 96.012,61.658 96.012,64.579
GND on Bottom Layer "Bottom Layer-No Net" (solid, remove dead copper, pour order 20): 84.963,51.244 87.058,51.244 87.058,48.197 87.058,47.053 85.788,47.053 85.788,48.197 84.963,48.196
GND on Bottom Layer "Bottom Layer-No Net" (solid, remove dead copper, pour order 16): 75.819,51.244 77.978,51.244 77.978,48.197 77.978,47.053 76.708,47.053 76.708,48.197 75.819,48.197
GND on Bottom Layer "Bottom Layer-No Net" (solid, remove dead copper, pour order 22): 93.98,51.244 96.139,51.244 96.139,48.197 96.139,47.053 94.869,47.053 94.869,48.197 93.98,48.197
PHC on Bottom Layer "Bottom Layer-No Net" (solid, remove dead copper, pour order 28): 78.359,57.34 81.407,57.34 81.407,52.26 81.153,52.006 81.153,41.084 78.359,41.084
PHB on Bottom Layer "Bottom Layer-No Net" (solid, remove dead copper, pour order 26): 87.439,57.34 90.487,57.34 90.487,52.26 90.233,52.006 90.233,41.084 87.439,41.084
PHA on Bottom Layer "Bottom Layer-No Net" (solid, remove dead copper, pour order 24): 96.52,57.34 99.568,57.34 99.568,52.26 99.314,52.006 99.314,41.084 96.52,41.084
GND on Bottom Layer "Bottom Layer-No Net" (solid, remove dead copper, pour order 32): 71.501,108.267 112.1,108.267 112.1,73.6 71.501,73.6
GND on Top Layer "Bottom Layer-No Net" (solid, remove dead copper, pour order 18): 103.124,51.498 103.124,46.038 75.692,46.037 75.692,51.498
GND on Top Layer "Bottom Layer-No Net" (solid, remove dead copper, pour order 30): 103.124,51.498 104.14,52.514 104.14,56.705 110.363,56.705 110.363,49.847 106.553,46.037 103.124,46.038
GND on Top Layer "Bottom Layer-No Net" (solid, remove dead copper, pour order 34): 71.501,108.267 112.1,108.267 112.1,73.6 71.501,73.6

## Other copper
Top Layer:
  pour cut-out: 104.9,73.5 106.2,74.8 112.2,74.8 112.2,73.5
Bottom Layer:
  pour cut-out: 104.9,73.5 106.2,74.8 112.2,74.8 112.2,73.5

## Silkscreen, mask and mechanical layers (free items; w line width, h text height)
Mechanical 1:
  the board outline again, w0.3

## Text inside footprints (layer, text, board x,y; h text height)
IC1: Mechanical 13 "ANTENNA" at 79.381,80.915 h1.78 r90